# EAGLE board RedBot_Panel_v14a (EAGLE 7.5.0), part 1 of 5
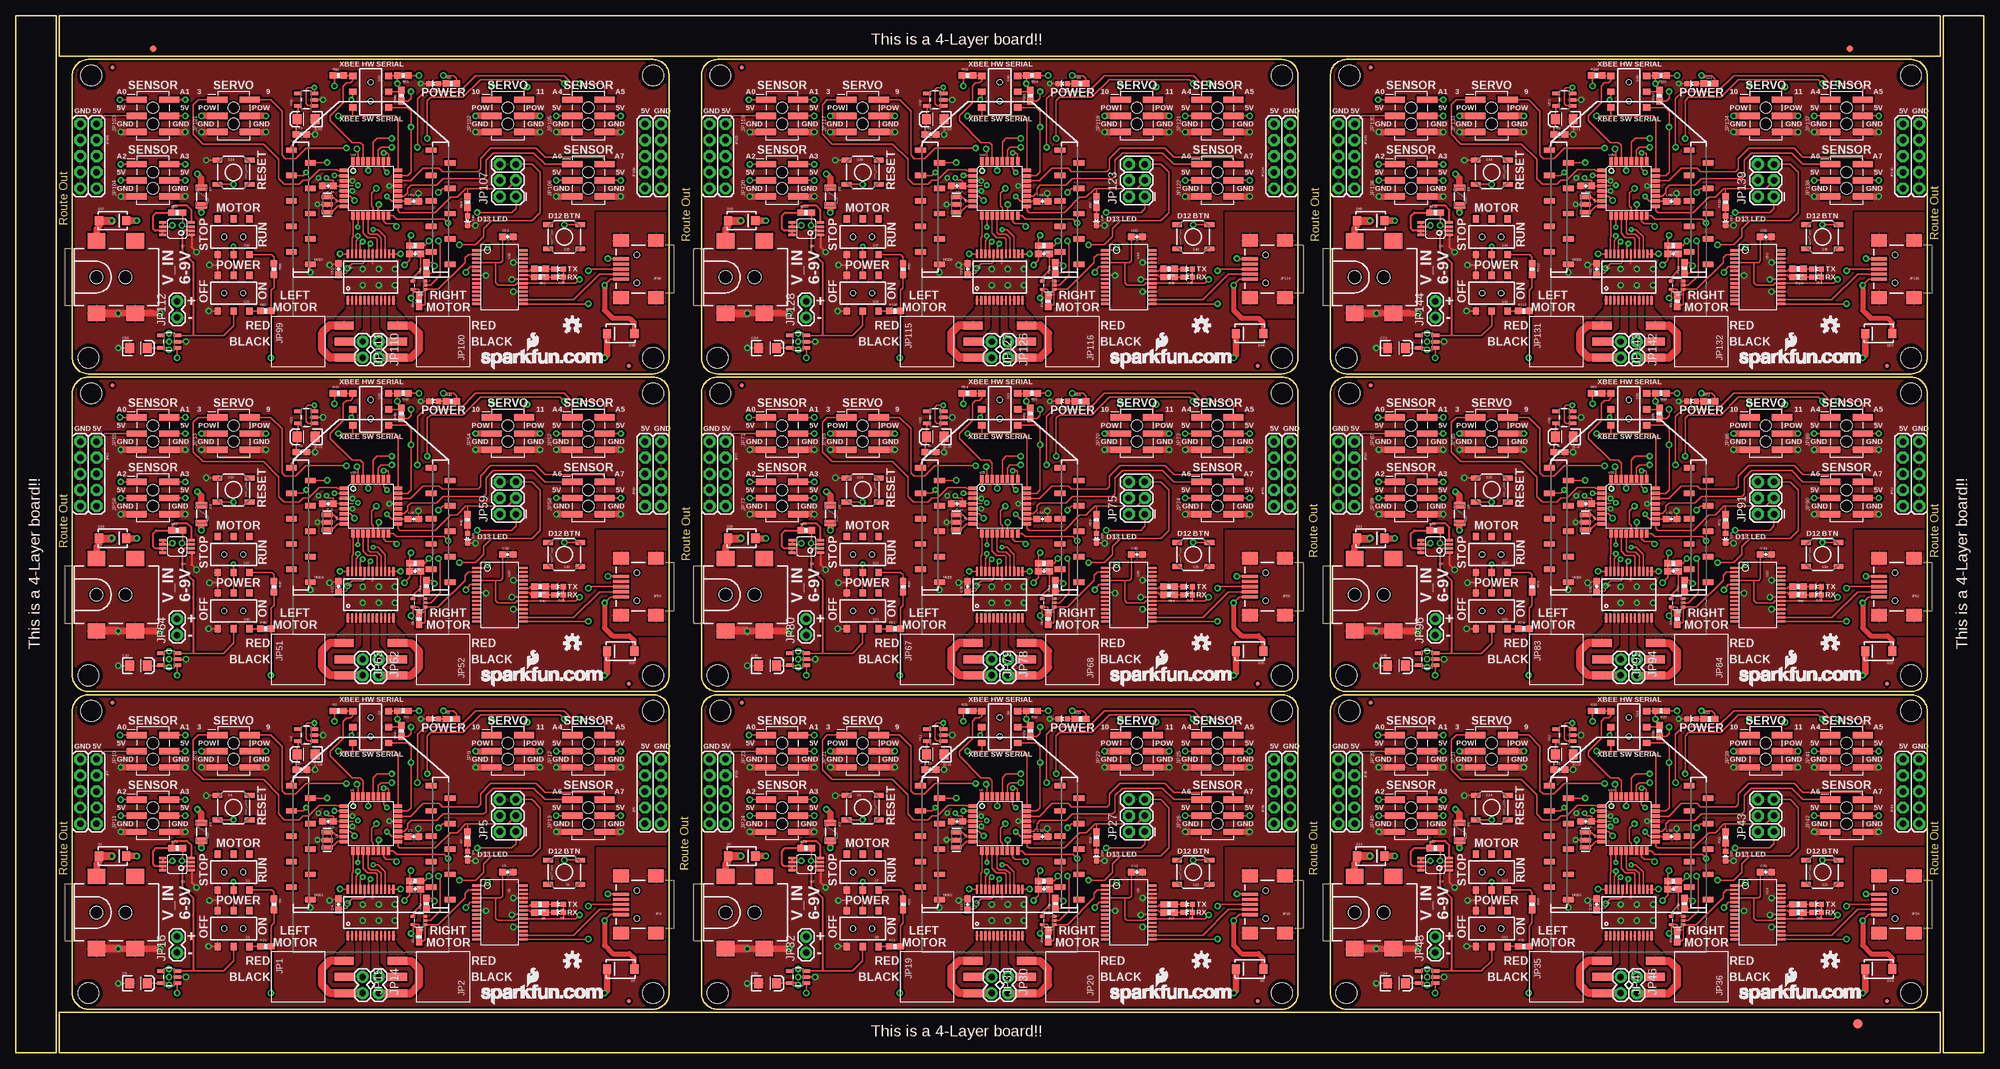
[diagram p0: board, top side]
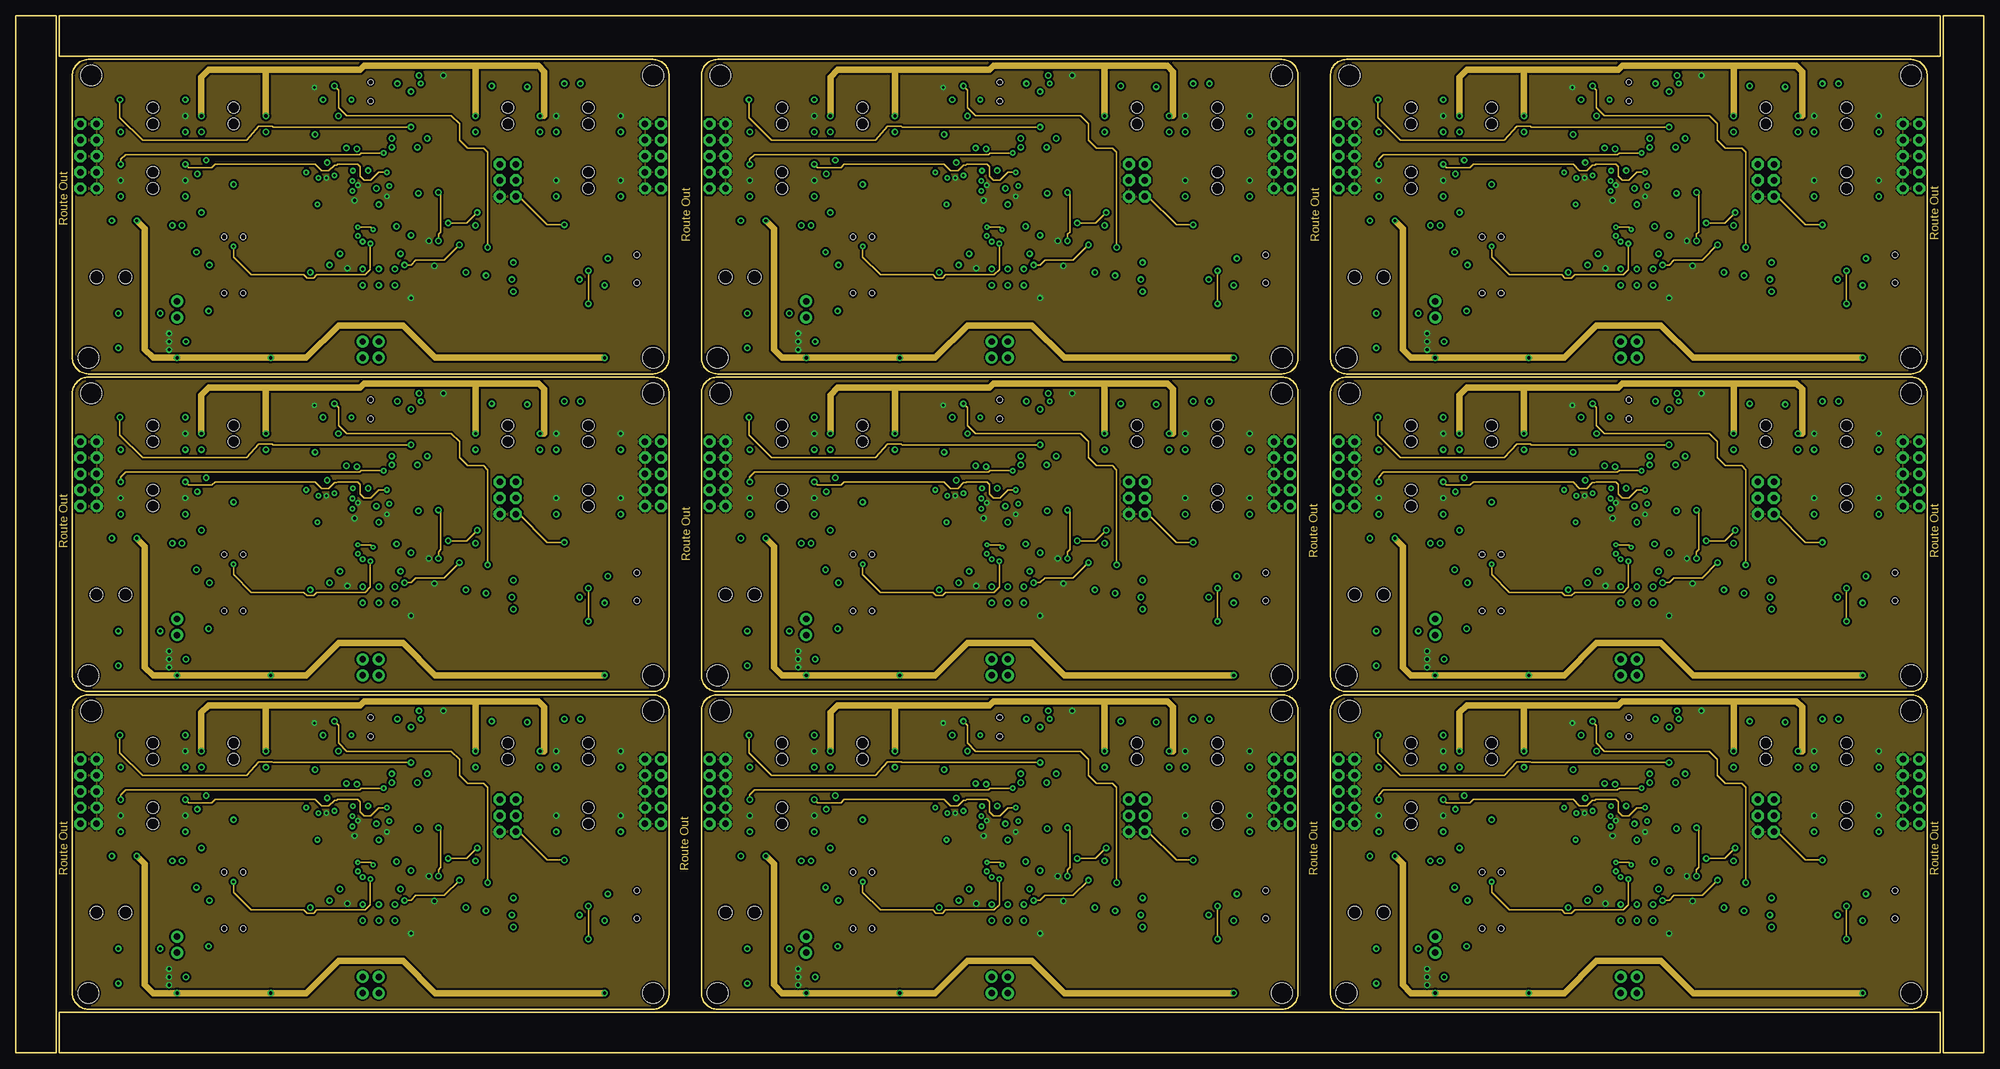
[diagram p1: board, inner layer 5V]
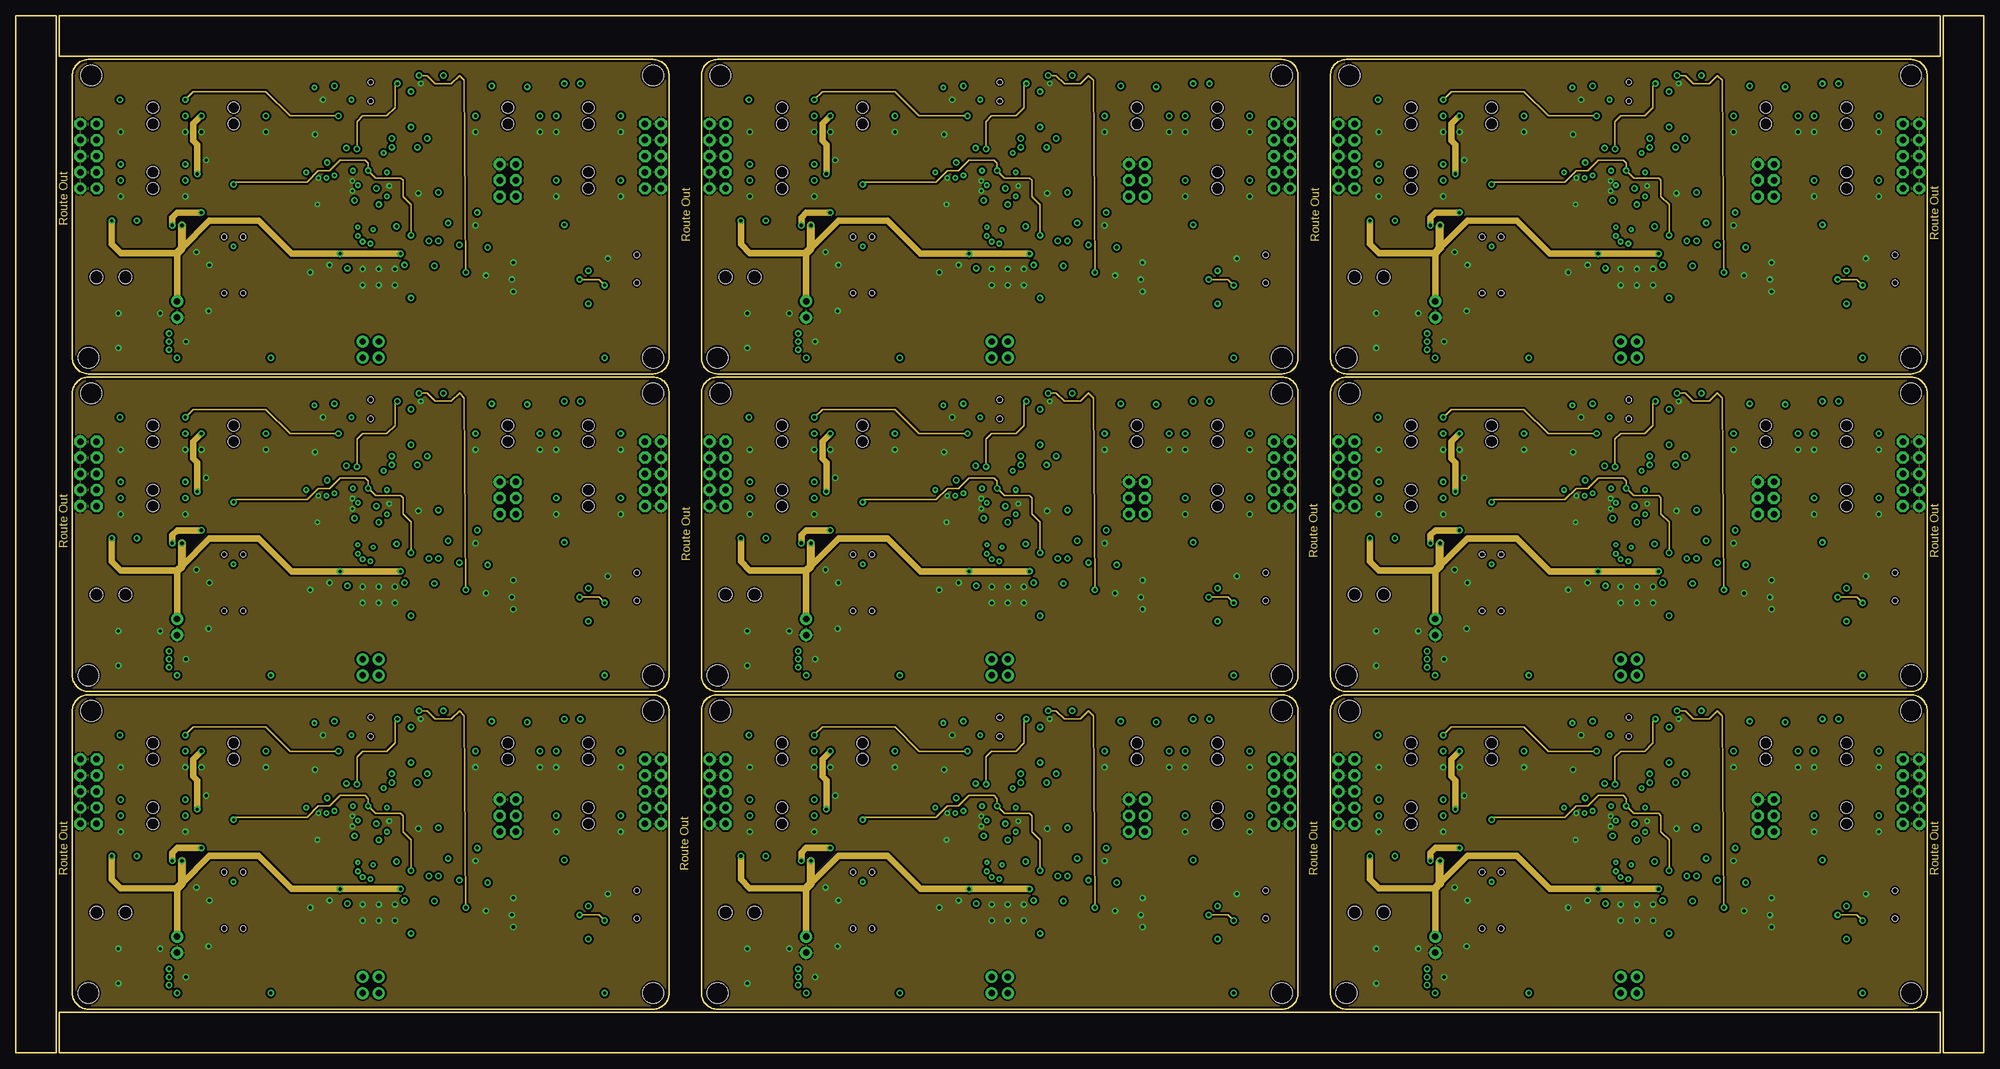
[diagram p2: board, inner layer Gnd]
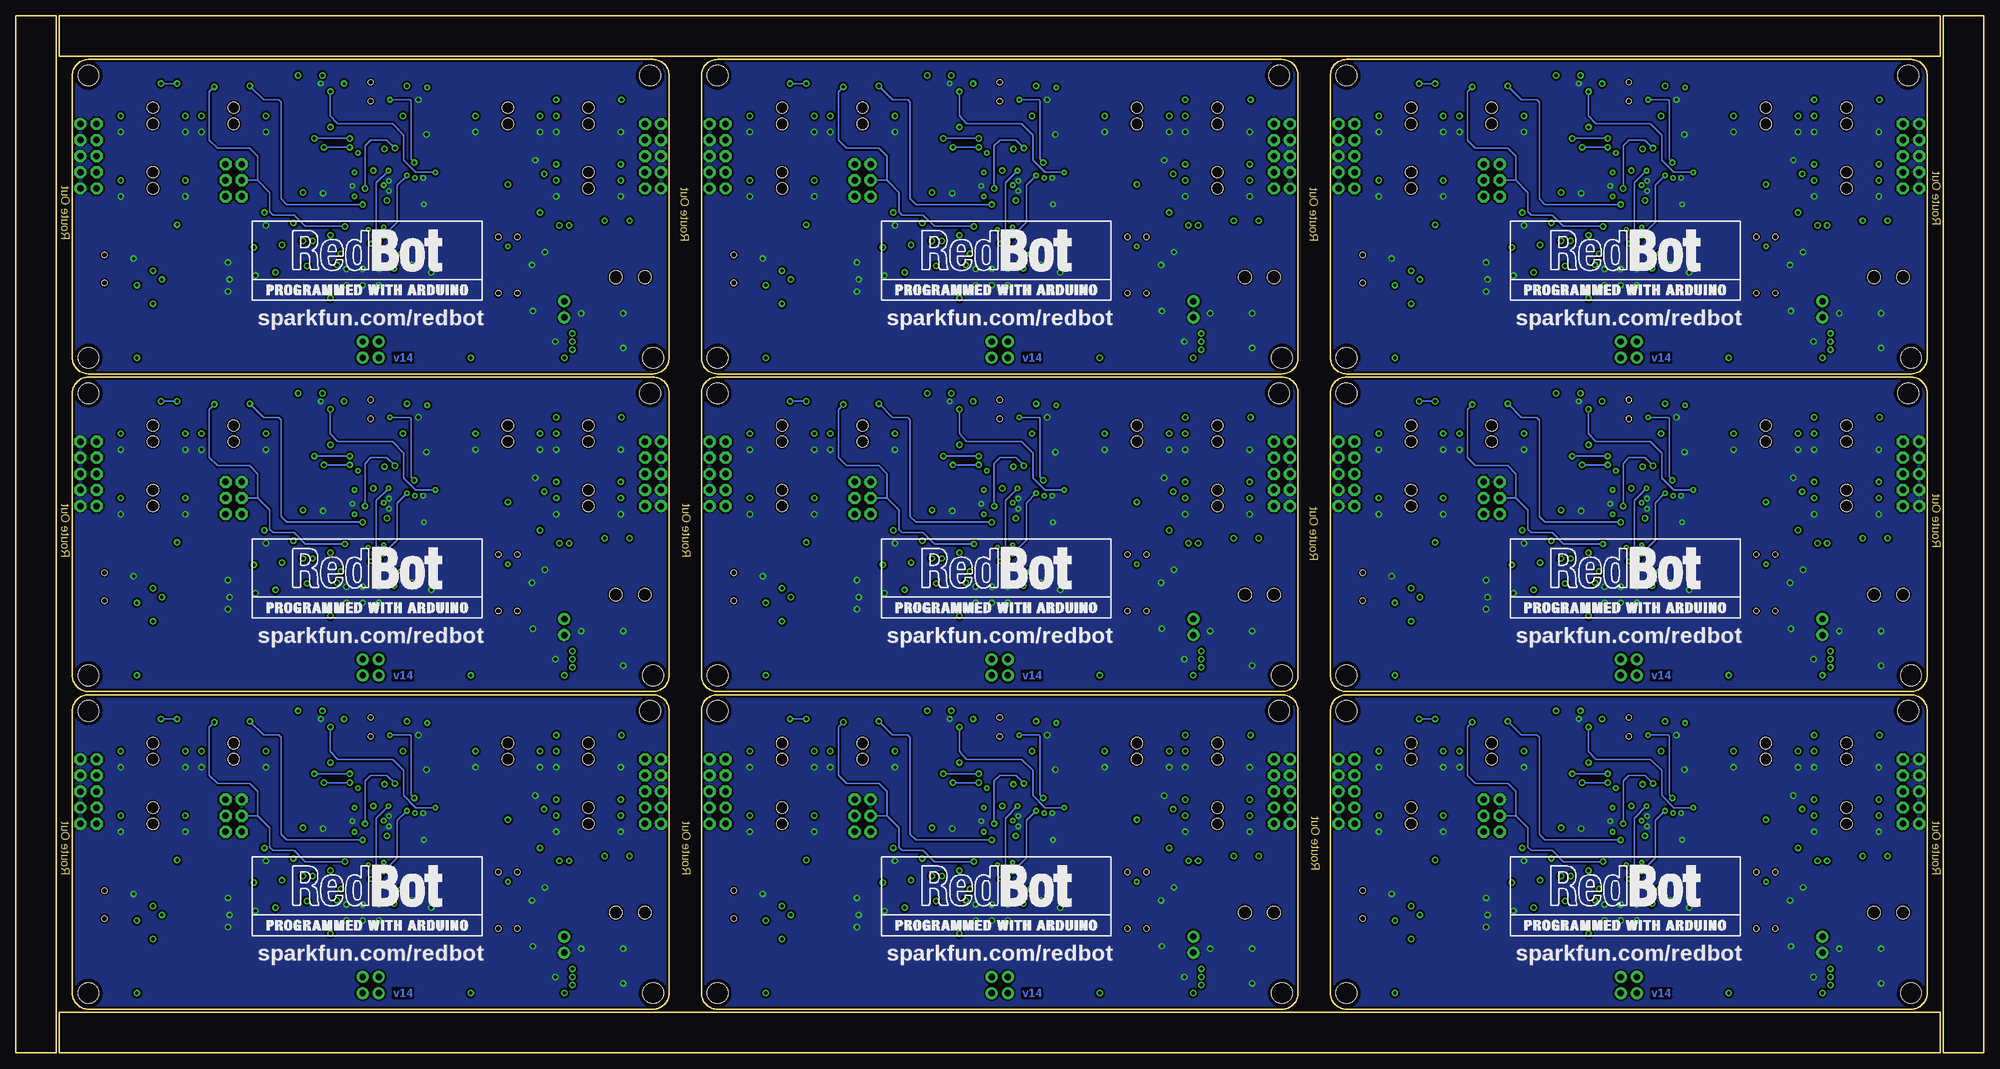
[diagram p3: board, bottom side, seen from below]

Size 309.88 x 163.32 mm. Coordinates in mm from the lower left corner, seen from the top.
Outline: 6.35,79.25 6.35,0 0,0 0,29.72
Outline: 0,27.18 0,163.32 6.35,163.32 6.35,76.71
Outline: 81.28,0 6.86,0 6.86,6.35 31.75,6.35
Outline: 29.21,6.35 303.02,6.35 303.02,0 78.74,0
Outline: 309.88,79.25 309.88,0 303.53,0 303.53,29.72
Outline: 303.53,27.18 303.53,163.32 309.88,163.32 309.88,76.71
Outline: 228.6,163.32 303.02,163.32 303.02,156.97 278.13,156.97
Outline: 280.67,156.97 6.86,156.97 6.86,163.32 231.14,163.32
Outline: 8.89,53.85 8.89,9.4 arc90 11.43,6.86 100.33,6.86 arc90 102.87,9.4 102.87,53.85 arc90 100.33,56.39 11.43,56.39 arc90 8.89,53.85
Outline: 107.95,53.85 107.95,9.4 arc90 110.49,6.86 199.39,6.86 arc90 201.93,9.4 201.93,53.85 arc90 199.39,56.39 110.49,56.39 arc90 107.95,53.85
Outline: 207.01,53.85 207.01,9.4 arc90 209.55,6.86 298.45,6.86 arc90 300.99,9.4 300.99,53.85 arc90 298.45,56.39 209.55,56.39 arc90 207.01,53.85
Outline: 8.89,103.89 8.89,59.44 arc90 11.43,56.9 100.33,56.9 arc90 102.87,59.44 102.87,103.89 arc90 100.33,106.43 11.43,106.43 arc90 8.89,103.89
Outline: 107.95,103.89 107.95,59.44 arc90 110.49,56.9 199.39,56.9 arc90 201.93,59.44 201.93,103.89 arc90 199.39,106.43 110.49,106.43 arc90 107.95,103.89
Outline: 207.01,103.89 207.01,59.44 arc90 209.55,56.9 298.45,56.9 arc90 300.99,59.44 300.99,103.89 arc90 298.45,106.43 209.55,106.43 arc90 207.01,103.89
Outline: 8.89,153.92 8.89,109.47 arc90 11.43,106.93 100.33,106.93 arc90 102.87,109.47 102.87,153.92 arc90 100.33,156.46 11.43,156.46 arc90 8.89,153.92
Outline: 107.95,153.92 107.95,109.47 arc90 110.49,106.93 199.39,106.93 arc90 201.93,109.47 201.93,153.92 arc90 199.39,156.46 110.49,156.46 arc90 107.95,153.92
Outline: 207.01,153.92 207.01,109.47 arc90 209.55,106.93 298.45,106.93 arc90 300.99,109.47 300.99,153.92 arc90 298.45,156.46 209.55,156.46 arc90 207.01,153.92
Copper layers (1*2+15*16): Top 0.035mm / dielectric 1.5mm / 5V 0.035mm / dielectric 0.15mm / Gnd 0.035mm / dielectric 0.2mm / Bottom 0.035mm
Design rules "Sparkfun *": minimum track width 8mil, minimum drill 15mil, track to track 8mil, track to pad 8mil, pad to pad 8mil, via to via 8mil, smd to smd 8mil, copper to edge 8mil, drill to drill 8mil, minimum pad ring 12mil, minimum via ring 10mil, stop-mask expansion 4mil, vias tented up to drill 20mil, thermal gap 10mil

## Footprints (pad centres in the part's own frame; a part is rotated, then mirrored left to right if it is on the bottom)
0603-CAP = smd 1.1 x 1: 1 -0.85,0; 2 0.85,0
EIA3216 = smd 1.4 x 1.6: A 1.4,0; C -1.4,0
SMA-DIODE = smd 1.27 x 1.47: A -2.15,0; C 2.15,0
LED-0603 = smd 0.8 x 0.8: A 0,-0.75; C 0,0.75
FIDUCIAL-1.5X3 = smd 1.5 x 1.5: 1 0,0
FIDUCIAL-1X2 = smd 1 x 1: 1 0,0
PTC-1206 = smd 1 x 1.8: 1 -1.4,0; 2 1.4,0
MICRO-FIDUCIAL = smd 0.635 x 0.635: 1 0,0
1X03_SMD_RA_FEMALE = smd 1.25 x 3: 1 -2.54,7.225; 2 0,7.225; 3 2.54,7.225
POWER_JACK_SMD = smd 2.8 x 2.4: GND 0,-5.7; P$4 6.1,-5.7; VIN0 0,5.7; VIN1 6.1,5.7 | hole 2.032: 0,0; 4.572,0
USB-MINIB = smd 2.5 x 0.5: D+ 2.5,0; D- 2.5,0.8; GND 2.5,-1.6; ID 2.5,-0.8; VBUS 2.5,1.6 | smd 2.5 x 2: MTN1 -3,4.5; MTN2 2.5,4.5; MTN3 -3,-4.5; MTN4 2.5,-4.5 | hole 0.9: 0,2.2; 0,-2.2
2X3 = drill 1.016 pad 1.88 octagon: 1 0,0; 2 0,2.54; 3 2.54,0; 4 2.54,2.54; 5 5.08,0; 6 5.08,2.54
2X5_NOSILK = drill 1.016 pad 1.88 octagon: 1 -1.27,5.08; 2 1.27,5.08; 3 -1.27,2.54; 4 1.27,2.54; 5 -1.27,0; 6 1.27,0; 7 -1.27,-2.54; 8 1.27,-2.54; 9 -1.27,-5.08; 10 1.27,-5.08
2X3_SMT_POSTS = smd 1 x 3.17: 1 -2.54,-2.54; 2 -2.54,2.54; 3 0,-2.54; 4 0,2.54; 5 2.54,-2.54; 6 2.54,2.54 | hole 1.8: -1.27,0; 1.27,0
1X02 = drill 1.016 pad 1.88: 1 0,0; 2 2.54,0
XBEE-SMD = smd 1.7 x 0.85: 1 -12.5,20; 2 -9.5,18; 3 -12.5,16; 4 -9.5,14; 5 -12.5,12; 6 -9.5,10; 7 -12.5,8; 8 -9.5,6; 9 -12.5,4; 10 -9.5,2; 11 12.5,2; 12 9.5,4; 13 12.5,6; 14 9.5,8; 15 12.5,10; 16 9.5,12; 17 12.5,14; 18 9.5,16; 19 12.5,18; 20 9.5,20
MSOP8 = smd 0.4 x 1.1: 1 -0.975,-2.25; 2 -0.325,-2.25; 3 0.325,-2.25; 4 0.975,-2.25; 5 0.975,2.25; 6 0.325,2.25; 7 -0.325,2.25; 8 -0.975,2.25
0603-RES = smd 1.1 x 1: 1 -0.85,0; 2 0.85,0
AYZ0202 = smd 1 x 1.15: 1 -2.5,2.825; 2 0,2.825; 3 2.5,2.825; 4 -2.5,-2.825; 5 0,-2.825; 6 2.5,-2.825 | hole 0.85: 1.5,0; -1.5,0
TACTILE_SWITCH_SMD = smd 1.524 x 0.762: 1 -2.54,1.905; 2 2.54,1.905; 3 -2.54,-1.905; 4 2.54,-1.905
STAND-OFF = hole 3.302: 0,0
TQFP32-08 = smd 1.27 x 0.559: 1 -4.293,2.8; 2 -4.293,2; 3 -4.293,1.2; 4 -4.293,0.4; 5 -4.293,-0.4; 6 -4.293,-1.2; 7 -4.293,-2; 8 -4.293,-2.8; 17 4.293,-2.8; 18 4.293,-2; 19 4.293,-1.2; 20 4.293,-0.4; 21 4.293,0.4; 22 4.293,1.2; 23 4.293,2; 24 4.293,2.8 | smd 0.559 x 1.27: 9 -2.8,-4.293; 10 -2,-4.293; 11 -1.2,-4.293; 12 -0.4,-4.293; 13 0.4,-4.293; 14 1.2,-4.293; 15 2,-4.293; 16 2.8,-4.293; 25 2.8,4.293; 26 2,4.293; 27 1.2,4.293; 28 0.4,4.293; 29 -0.4,4.293; 30 -1.2,4.293; 31 -2,4.293; 32 -2.8,4.293
SSOP24 = smd 0.348 x 1.397: 1 -3.575,-3.656; 2 -2.925,-3.656; 3 -2.275,-3.656; 4 -1.625,-3.656; 5 -0.975,-3.656; 6 -0.325,-3.656; 7 0.325,-3.656; 8 0.975,-3.656; 9 1.625,-3.656; 10 2.275,-3.656; 11 2.925,-3.656; 12 3.575,-3.656; 13 3.575,3.656; 14 2.925,3.656; 15 2.275,3.656; 16 1.625,3.656; 17 0.975,3.656; 18 0.325,3.656; 19 -0.325,3.656; 20 -0.975,3.656; 21 -1.625,3.656; 22 -2.275,3.656; 23 -2.925,3.656; 24 -3.575,3.656
SOT23-5 = smd 0.55 x 1.2: 1 -0.95,-1.3; 2 0,-1.3; 3 0.95,-1.3; 4 0.95,1.3; 5 -0.95,1.3
SSOP28DB = smd 0.348 x 1.397: 1 -4.225,-3.656; 2 -3.575,-3.656; 3 -2.925,-3.656; 4 -2.275,-3.656; 5 -1.625,-3.656; 6 -0.975,-3.656; 7 -0.325,-3.656; 8 0.325,-3.656; 9 0.975,-3.656; 10 1.625,-3.656; 11 2.275,-3.656; 12 2.925,-3.656; 13 3.575,-3.656; 14 4.225,-3.656; 15 4.225,3.656; 16 3.575,3.656; 17 2.925,3.656; 18 2.275,3.656; 19 1.625,3.656; 20 0.975,3.656; 21 0.325,3.656; 22 -0.325,3.656; 23 -0.975,3.656; 24 -1.625,3.656; 25 -2.275,3.656; 26 -2.925,3.656; 27 -3.575,3.656; 28 -4.225,3.656
SOT353 = smd 0.42 x 0.7: 1 -0.65,-0.95; 2 0,-0.95; 3 0.65,-0.95; 4 0.65,0.95; 5 -0.65,0.95
RESONATOR-SMD = smd 0.7 x 1.7: 1 -1.2,0; 2 0,0; 3 1.2,0

## Placement (x,y rotation side)
C1  0.1uF  [0603-CAP]  148.21,36.45 180 top
C2  0.1uF  [0603-CAP]  49.15,36.45 180 top
C3  0.1uF  [0603-CAP]  62.61,34.04 0 top
C4  0.1uF  [0603-CAP]  50.8,23.37 90 top
C5  0.1uF  [0603-CAP]  77.47,28.45 0 top
C6  0.1uF  [0603-CAP]  44.96,44.58 0 top
C7  0.1uF  [0603-CAP]  62.87,25.78 0 top
C8  10uF  [EIA3216]  45.72,46.99 180 top
C9  10uF  [EIA3216]  19.3,10.92 0 top
C10  0.1uF  [0603-CAP]  161.67,34.04 0 top
C11  0.1uF  [0603-CAP]  149.86,23.37 90 top
C12  0.1uF  [0603-CAP]  176.53,28.45 0 top
C13  0.1uF  [0603-CAP]  144.02,44.58 0 top
C14  0.1uF  [0603-CAP]  161.93,25.78 0 top
C15  10uF  [EIA3216]  144.78,46.99 180 top
C16  10uF  [EIA3216]  118.36,10.92 0 top
C17  0.1uF  [0603-CAP]  247.27,36.45 180 top
C18  0.1uF  [0603-CAP]  260.73,34.04 0 top
C19  0.1uF  [0603-CAP]  248.92,23.37 90 top
C20  0.1uF  [0603-CAP]  275.59,28.45 0 top
C21  0.1uF  [0603-CAP]  243.08,44.58 0 top
C22  0.1uF  [0603-CAP]  260.99,25.78 0 top
C23  10uF  [EIA3216]  243.84,46.99 180 top
C24  10uF  [EIA3216]  217.42,10.92 0 top
C25  0.1uF  [0603-CAP]  49.15,86.49 180 top
C26  0.1uF  [0603-CAP]  62.61,84.07 0 top
C27  0.1uF  [0603-CAP]  50.8,73.41 90 top
C28  0.1uF  [0603-CAP]  77.47,78.49 0 top
C29  0.1uF  [0603-CAP]  44.96,94.61 0 top
C30  0.1uF  [0603-CAP]  62.87,75.82 0 top
C31  10uF  [EIA3216]  45.72,97.03 180 top
C32  10uF  [EIA3216]  19.3,60.96 0 top
C33  0.1uF  [0603-CAP]  148.21,86.49 180 top
C34  0.1uF  [0603-CAP]  161.67,84.07 0 top
C35  0.1uF  [0603-CAP]  149.86,73.41 90 top
C36  0.1uF  [0603-CAP]  176.53,78.49 0 top
C37  0.1uF  [0603-CAP]  144.02,94.61 0 top
C38  0.1uF  [0603-CAP]  161.93,75.82 0 top
C39  10uF  [EIA3216]  144.78,97.03 180 top
C40  10uF  [EIA3216]  118.36,60.96 0 top
C41  0.1uF  [0603-CAP]  247.27,86.49 180 top
C42  0.1uF  [0603-CAP]  260.73,84.07 0 top
C43  0.1uF  [0603-CAP]  248.92,73.41 90 top
C44  0.1uF  [0603-CAP]  275.59,78.49 0 top
C45  0.1uF  [0603-CAP]  243.08,94.61 0 top
C46  0.1uF  [0603-CAP]  260.99,75.82 0 top
C47  10uF  [EIA3216]  243.84,97.03 180 top
C48  10uF  [EIA3216]  217.42,60.96 0 top
C49  0.1uF  [0603-CAP]  49.15,136.53 180 top
C50  0.1uF  [0603-CAP]  62.61,134.11 0 top
C51  0.1uF  [0603-CAP]  50.8,123.44 90 top
C52  0.1uF  [0603-CAP]  77.47,128.52 0 top
C53  0.1uF  [0603-CAP]  44.96,144.65 0 top
C54  0.1uF  [0603-CAP]  62.87,125.86 0 top
C55  10uF  [EIA3216]  45.72,147.07 180 top
C56  10uF  [EIA3216]  19.3,111 0 top
C57  0.1uF  [0603-CAP]  148.21,136.53 180 top
C58  0.1uF  [0603-CAP]  161.67,134.11 0 top
C59  0.1uF  [0603-CAP]  149.86,123.44 90 top
C60  0.1uF  [0603-CAP]  176.53,128.52 0 top
C61  0.1uF  [0603-CAP]  144.02,144.65 0 top
C62  0.1uF  [0603-CAP]  161.93,125.86 0 top
C63  10uF  [EIA3216]  144.78,147.07 180 top
C64  10uF  [EIA3216]  118.36,111 0 top
C65  0.1uF  [0603-CAP]  247.27,136.53 180 top
C66  0.1uF  [0603-CAP]  260.73,134.11 0 top
C67  0.1uF  [0603-CAP]  248.92,123.44 90 top
C68  0.1uF  [0603-CAP]  275.59,128.52 0 top
C69  0.1uF  [0603-CAP]  243.08,144.65 0 top
C70  0.1uF  [0603-CAP]  260.99,125.86 0 top
C71  10uF  [EIA3216]  243.84,147.07 180 top
C72  10uF  [EIA3216]  217.42,111 0 top
D1  [SMA-DIODE]  15.24,30.99 0 top
D2  [SMA-DIODE]  95.25,13.21 180 top
D3  GREEN  [LED-0603]  85.47,22.1 90 top
D4  GREEN  [LED-0603]  71.12,30.99 180 top
D5  GREEN  [LED-0603]  85.47,23.37 90 top
D6  GREEN  [LED-0603]  65.79,52.58 90 top
D7  [SMA-DIODE]  114.3,30.99 0 top
D8  [SMA-DIODE]  194.31,13.21 180 top
D9  GREEN  [LED-0603]  184.53,22.1 90 top
D10  GREEN  [LED-0603]  170.18,30.99 180 top
D11  GREEN  [LED-0603]  184.53,23.37 90 top
D12  GREEN  [LED-0603]  164.85,52.58 90 top
D13  [SMA-DIODE]  213.36,30.99 0 top
D14  [SMA-DIODE]  293.37,13.21 180 top
D15  GREEN  [LED-0603]  283.59,22.1 90 top
D16  GREEN  [LED-0603]  269.24,30.99 180 top
D17  GREEN  [LED-0603]  283.59,23.37 90 top
D18  GREEN  [LED-0603]  263.91,52.58 90 top
D19  [SMA-DIODE]  15.24,81.03 0 top
D20  [SMA-DIODE]  95.25,63.25 180 top
D21  GREEN  [LED-0603]  85.47,72.14 90 top
D22  GREEN  [LED-0603]  71.12,81.03 180 top
D23  GREEN  [LED-0603]  85.47,73.41 90 top
D24  GREEN  [LED-0603]  65.79,102.62 90 top
D25  [SMA-DIODE]  114.3,81.03 0 top
D26  [SMA-DIODE]  194.31,63.25 180 top
D27  GREEN  [LED-0603]  184.53,72.14 90 top
D28  GREEN  [LED-0603]  170.18,81.03 180 top
D29  GREEN  [LED-0603]  184.53,73.41 90 top
D30  GREEN  [LED-0603]  164.85,102.62 90 top
D31  [SMA-DIODE]  213.36,81.03 0 top
D32  [SMA-DIODE]  293.37,63.25 180 top
D33  GREEN  [LED-0603]  283.59,72.14 90 top
D34  GREEN  [LED-0603]  269.24,81.03 180 top
D35  GREEN  [LED-0603]  283.59,73.41 90 top
D36  GREEN  [LED-0603]  263.91,102.62 90 top
D37  [SMA-DIODE]  15.24,131.06 0 top
D38  [SMA-DIODE]  95.25,113.28 180 top
D39  GREEN  [LED-0603]  85.47,122.17 90 top
D40  GREEN  [LED-0603]  71.12,131.06 180 top
D41  GREEN  [LED-0603]  85.47,123.44 90 top
D42  GREEN  [LED-0603]  65.79,152.65 90 top
D43  [SMA-DIODE]  114.3,131.06 0 top
D44  [SMA-DIODE]  194.31,113.28 180 top
D45  GREEN  [LED-0603]  184.53,122.17 90 top
D46  GREEN  [LED-0603]  170.18,131.06 180 top
D47  GREEN  [LED-0603]  184.53,123.44 90 top
D48  GREEN  [LED-0603]  164.85,152.65 90 top
D49  [SMA-DIODE]  213.36,131.06 0 top
D50  [SMA-DIODE]  293.37,113.28 180 top
D51  GREEN  [LED-0603]  283.59,122.17 90 top
D52  GREEN  [LED-0603]  269.24,131.06 180 top
D53  GREEN  [LED-0603]  283.59,123.44 90 top
D54  GREEN  [LED-0603]  263.91,152.65 90 top
E$1  [FIDUCIAL-1.5X3]  290.07,4.57 0 top
E$7  [FIDUCIAL-1X2]  288.8,158.12 90 top
E$8  [FIDUCIAL-1X2]  21.59,158.12 270 top
F1  PTCSMD  [PTC-1206]  29.21,34.8 270 top
F2  PTCSMD  [PTC-1206]  128.27,34.8 270 top
F3  PTCSMD  [PTC-1206]  227.33,34.8 270 top
F4  PTCSMD  [PTC-1206]  29.21,84.84 270 top
F5  PTCSMD  [PTC-1206]  128.27,84.84 270 top
F6  PTCSMD  [PTC-1206]  227.33,84.84 270 top
F7  PTCSMD  [PTC-1206]  29.21,134.87 270 top
F8  PTCSMD  [PTC-1206]  128.27,134.87 270 top
F9  PTCSMD  [PTC-1206]  227.33,134.87 270 top
FID1  FIDUCIALUFIDUCIAL  [MICRO-FIDUCIAL]  15.24,55.12 0 top
FID2  FIDUCIALUFIDUCIAL  [MICRO-FIDUCIAL]  96.52,8.13 0 top
FID3  FIDUCIALUFIDUCIAL  [MICRO-FIDUCIAL]  114.3,55.12 0 top
FID4  FIDUCIALUFIDUCIAL  [MICRO-FIDUCIAL]  195.58,8.13 0 top
FID5  FIDUCIALUFIDUCIAL  [MICRO-FIDUCIAL]  213.36,55.12 0 top
FID6  FIDUCIALUFIDUCIAL  [MICRO-FIDUCIAL]  294.64,8.13 0 top
FID7  FIDUCIALUFIDUCIAL  [MICRO-FIDUCIAL]  15.24,105.16 0 top
FID8  FIDUCIALUFIDUCIAL  [MICRO-FIDUCIAL]  96.52,58.17 0 top
FID9  FIDUCIALUFIDUCIAL  [MICRO-FIDUCIAL]  114.3,105.16 0 top
FID10  FIDUCIALUFIDUCIAL  [MICRO-FIDUCIAL]  195.58,58.17 0 top
FID11  FIDUCIALUFIDUCIAL  [MICRO-FIDUCIAL]  213.36,105.16 0 top
FID12  FIDUCIALUFIDUCIAL  [MICRO-FIDUCIAL]  294.64,58.17 0 top
FID13  FIDUCIALUFIDUCIAL  [MICRO-FIDUCIAL]  15.24,155.19 0 top
FID14  FIDUCIALUFIDUCIAL  [MICRO-FIDUCIAL]  96.52,108.2 0 top
FID15  FIDUCIALUFIDUCIAL  [MICRO-FIDUCIAL]  114.3,155.19 0 top
FID16  FIDUCIALUFIDUCIAL  [MICRO-FIDUCIAL]  195.58,108.2 0 top
FID17  FIDUCIALUFIDUCIAL  [MICRO-FIDUCIAL]  213.36,155.19 0 top
FID18  FIDUCIALUFIDUCIAL  [MICRO-FIDUCIAL]  294.64,108.2 0 top
JP1  1x3 RA Female .1"  [1X03_SMD_RA_FEMALE]  44.45,11.94 270 top
JP2  1x3 RA Female .1"  [1X03_SMD_RA_FEMALE]  67.31,11.94 90 top
JP3  5.5x2.1mm Barrel  [POWER_JACK_SMD]  12.7,22.1 0 top
JP4  USB-B  [USB-MINIB]  97.79,23.37 180 top
JP5  AVR_SPI_PRG_6PTH  [2X3]  78.74,34.8 90 top
JP6  M05X2NO_SILK  [2X5_NOSILK]  100.33,41.15 0 top
JP7  M05X2NO_SILK  [2X5_NOSILK]  11.43,41.15 180 top
JP8  [2X3_SMT_POSTS]  34.29,47.5 270 top
JP9  [2X3_SMT_POSTS]  77.47,47.5 270 top
JP10  [2X3_SMT_POSTS]  21.59,47.5 270 top
JP11  [2X3_SMT_POSTS]  21.59,37.34 270 top
JP12  [2X3_SMT_POSTS]  90.17,47.5 270 top
JP13  [2X3_SMT_POSTS]  90.17,37.34 270 top
JP14  [1X02]  57.15,11.94 270 top
JP15  [1X02]  54.61,11.94 270 top
JP16  [1X02]  25.4,15.75 90 top
JP17  5.5x2.1mm Barrel  [POWER_JACK_SMD]  111.76,22.1 0 top
JP18  USB-B  [USB-MINIB]  196.85,23.37 180 top
JP19  1x3 RA Female .1"  [1X03_SMD_RA_FEMALE]  143.51,11.94 270 top
JP20  1x3 RA Female .1"  [1X03_SMD_RA_FEMALE]  166.37,11.94 90 top
JP21  [2X3_SMT_POSTS]  133.35,47.5 270 top
JP22  [2X3_SMT_POSTS]  176.53,47.5 270 top
JP23  [2X3_SMT_POSTS]  120.65,47.5 270 top
JP24  [2X3_SMT_POSTS]  120.65,37.34 270 top
JP25  [2X3_SMT_POSTS]  189.23,47.5 270 top
JP26  [2X3_SMT_POSTS]  189.23,37.34 270 top
JP27  AVR_SPI_PRG_6PTH  [2X3]  177.8,34.8 90 top
JP28  M05X2NO_SILK  [2X5_NOSILK]  199.39,41.15 0 top
JP29  M05X2NO_SILK  [2X5_NOSILK]  110.49,41.15 180 top
JP30  [1X02]  156.21,11.94 270 top
JP31  [1X02]  153.67,11.94 270 top
JP32  [1X02]  124.46,15.75 90 top
JP33  5.5x2.1mm Barrel  [POWER_JACK_SMD]  210.82,22.1 0 top
JP34  USB-B  [USB-MINIB]  295.91,23.37 180 top
JP35  1x3 RA Female .1"  [1X03_SMD_RA_FEMALE]  242.57,11.94 270 top
JP36  1x3 RA Female .1"  [1X03_SMD_RA_FEMALE]  265.43,11.94 90 top
JP37  [2X3_SMT_POSTS]  232.41,47.5 270 top
JP38  [2X3_SMT_POSTS]  275.59,47.5 270 top
JP39  [2X3_SMT_POSTS]  219.71,47.5 270 top
JP40  [2X3_SMT_POSTS]  219.71,37.34 270 top
JP41  [2X3_SMT_POSTS]  288.29,47.5 270 top
JP42  [2X3_SMT_POSTS]  288.29,37.34 270 top
JP43  AVR_SPI_PRG_6PTH  [2X3]  276.86,34.8 90 top
JP44  M05X2NO_SILK  [2X5_NOSILK]  298.45,41.15 0 top
JP45  M05X2NO_SILK  [2X5_NOSILK]  209.55,41.15 180 top
JP46  [1X02]  255.27,11.94 270 top
JP47  [1X02]  252.73,11.94 270 top
JP48  [1X02]  223.52,15.75 90 top
JP49  5.5x2.1mm Barrel  [POWER_JACK_SMD]  12.7,72.14 0 top
JP50  USB-B  [USB-MINIB]  97.79,73.41 180 top
JP51  1x3 RA Female .1"  [1X03_SMD_RA_FEMALE]  44.45,61.98 270 top
JP52  1x3 RA Female .1"  [1X03_SMD_RA_FEMALE]  67.31,61.98 90 top
JP53  [2X3_SMT_POSTS]  34.29,97.54 270 top
JP54  [2X3_SMT_POSTS]  77.47,97.54 270 top
JP55  [2X3_SMT_POSTS]  21.59,97.54 270 top
JP56  [2X3_SMT_POSTS]  21.59,87.38 270 top
JP57  [2X3_SMT_POSTS]  90.17,97.54 270 top
JP58  [2X3_SMT_POSTS]  90.17,87.38 270 top
JP59  AVR_SPI_PRG_6PTH  [2X3]  78.74,84.84 90 top
JP60  M05X2NO_SILK  [2X5_NOSILK]  100.33,91.19 0 top
JP61  M05X2NO_SILK  [2X5_NOSILK]  11.43,91.19 180 top
JP62  [1X02]  57.15,61.98 270 top
JP63  [1X02]  54.61,61.98 270 top
JP64  [1X02]  25.4,65.79 90 top
JP65  5.5x2.1mm Barrel  [POWER_JACK_SMD]  111.76,72.14 0 top
JP66  USB-B  [USB-MINIB]  196.85,73.41 180 top
JP67  1x3 RA Female .1"  [1X03_SMD_RA_FEMALE]  143.51,61.98 270 top
JP68  1x3 RA Female .1"  [1X03_SMD_RA_FEMALE]  166.37,61.98 90 top
JP69  [2X3_SMT_POSTS]  133.35,97.54 270 top
JP70  [2X3_SMT_POSTS]  176.53,97.54 270 top
JP71  [2X3_SMT_POSTS]  120.65,97.54 270 top
JP72  [2X3_SMT_POSTS]  120.65,87.38 270 top
JP73  [2X3_SMT_POSTS]  189.23,97.54 270 top
JP74  [2X3_SMT_POSTS]  189.23,87.38 270 top
JP75  AVR_SPI_PRG_6PTH  [2X3]  177.8,84.84 90 top
JP76  M05X2NO_SILK  [2X5_NOSILK]  199.39,91.19 0 top
JP77  M05X2NO_SILK  [2X5_NOSILK]  110.49,91.19 180 top
JP78  [1X02]  156.21,61.98 270 top
JP79  [1X02]  153.67,61.98 270 top
JP80  [1X02]  124.46,65.79 90 top
JP81  5.5x2.1mm Barrel  [POWER_JACK_SMD]  210.82,72.14 0 top
JP82  USB-B  [USB-MINIB]  295.91,73.41 180 top
JP83  1x3 RA Female .1"  [1X03_SMD_RA_FEMALE]  242.57,61.98 270 top
JP84  1x3 RA Female .1"  [1X03_SMD_RA_FEMALE]  265.43,61.98 90 top
JP85  [2X3_SMT_POSTS]  232.41,97.54 270 top
JP86  [2X3_SMT_POSTS]  275.59,97.54 270 top
JP87  [2X3_SMT_POSTS]  219.71,97.54 270 top
JP88  [2X3_SMT_POSTS]  219.71,87.38 270 top
JP89  [2X3_SMT_POSTS]  288.29,97.54 270 top
JP90  [2X3_SMT_POSTS]  288.29,87.38 270 top
JP91  AVR_SPI_PRG_6PTH  [2X3]  276.86,84.84 90 top
JP92  M05X2NO_SILK  [2X5_NOSILK]  298.45,91.19 0 top
JP93  M05X2NO_SILK  [2X5_NOSILK]  209.55,91.19 180 top
JP94  [1X02]  255.27,61.98 270 top
JP95  [1X02]  252.73,61.98 270 top
JP96  [1X02]  223.52,65.79 90 top
JP97  5.5x2.1mm Barrel  [POWER_JACK_SMD]  12.7,122.17 0 top
JP98  USB-B  [USB-MINIB]  97.79,123.44 180 top
JP99  1x3 RA Female .1"  [1X03_SMD_RA_FEMALE]  44.45,112.01 270 top
JP100  1x3 RA Female .1"  [1X03_SMD_RA_FEMALE]  67.31,112.01 90 top
JP101  [2X3_SMT_POSTS]  34.29,147.57 270 top
JP102  [2X3_SMT_POSTS]  77.47,147.57 270 top
JP103  [2X3_SMT_POSTS]  21.59,147.57 270 top
JP104  [2X3_SMT_POSTS]  21.59,137.41 270 top
JP105  [2X3_SMT_POSTS]  90.17,147.57 270 top
JP106  [2X3_SMT_POSTS]  90.17,137.41 270 top
JP107  AVR_SPI_PRG_6PTH  [2X3]  78.74,134.87 90 top
JP108  M05X2NO_SILK  [2X5_NOSILK]  100.33,141.22 0 top
JP109  M05X2NO_SILK  [2X5_NOSILK]  11.43,141.22 180 top
JP110  [1X02]  57.15,112.01 270 top
JP111  [1X02]  54.61,112.01 270 top
JP112  [1X02]  25.4,115.82 90 top
JP113  5.5x2.1mm Barrel  [POWER_JACK_SMD]  111.76,122.17 0 top
JP114  USB-B  [USB-MINIB]  196.85,123.44 180 top
JP115  1x3 RA Female .1"  [1X03_SMD_RA_FEMALE]  143.51,112.01 270 top
JP116  1x3 RA Female .1"  [1X03_SMD_RA_FEMALE]  166.37,112.01 90 top
JP117  [2X3_SMT_POSTS]  133.35,147.57 270 top
JP118  [2X3_SMT_POSTS]  176.53,147.57 270 top
JP119  [2X3_SMT_POSTS]  120.65,147.57 270 top
JP120  [2X3_SMT_POSTS]  120.65,137.41 270 top
JP121  [2X3_SMT_POSTS]  189.23,147.57 270 top
JP122  [2X3_SMT_POSTS]  189.23,137.41 270 top
JP123  AVR_SPI_PRG_6PTH  [2X3]  177.8,134.87 90 top
JP124  M05X2NO_SILK  [2X5_NOSILK]  199.39,141.22 0 top
JP125  M05X2NO_SILK  [2X5_NOSILK]  110.49,141.22 180 top
JP126  [1X02]  156.21,112.01 270 top
JP127  [1X02]  153.67,112.01 270 top
JP128  [1X02]  124.46,115.82 90 top
JP129  5.5x2.1mm Barrel  [POWER_JACK_SMD]  210.82,122.17 0 top
JP130  USB-B  [USB-MINIB]  295.91,123.44 180 top
JP131  1x3 RA Female .1"  [1X03_SMD_RA_FEMALE]  242.57,112.01 270 top
JP132  1x3 RA Female .1"  [1X03_SMD_RA_FEMALE]  265.43,112.01 90 top
JP133  [2X3_SMT_POSTS]  232.41,147.57 270 top
JP134  [2X3_SMT_POSTS]  275.59,147.57 270 top
JP135  [2X3_SMT_POSTS]  219.71,147.57 270 top
JP136  [2X3_SMT_POSTS]  219.71,137.41 270 top
JP137  [2X3_SMT_POSTS]  288.29,147.57 270 top
JP138  [2X3_SMT_POSTS]  288.29,137.41 270 top
JP139  AVR_SPI_PRG_6PTH  [2X3]  276.86,134.87 90 top
JP140  M05X2NO_SILK  [2X5_NOSILK]  298.45,141.22 0 top
JP141  M05X2NO_SILK  [2X5_NOSILK]  209.55,141.22 180 top
JP142  [1X02]  255.27,112.01 270 top
JP143  [1X02]  252.73,112.01 270 top
JP144  [1X02]  223.52,115.82 90 top
MOD1  XBEE-1B3  [XBEE-SMD]  55.88,22.1 0 top
MOD2  XBEE-1B3  [XBEE-SMD]  154.94,22.1 0 top
MOD3  XBEE-1B3  [XBEE-SMD]  254,22.1 0 top
MOD4  XBEE-1B3  [XBEE-SMD]  55.88,72.14 0 top
MOD5  XBEE-1B3  [XBEE-SMD]  154.94,72.14 0 top
MOD6  XBEE-1B3  [XBEE-SMD]  254,72.14 0 top
MOD7  XBEE-1B3  [XBEE-SMD]  55.88,122.17 0 top
MOD8  XBEE-1B3  [XBEE-SMD]  154.94,122.17 0 top
MOD9  XBEE-1B3  [XBEE-SMD]  254,122.17 0 top
Q1  [MSOP8]  25.4,29.72 90 top
Q2  [MSOP8]  124.46,29.72 90 top
Q3  [MSOP8]  223.52,29.72 90 top
Q4  [MSOP8]  25.4,79.76 90 top
Q5  [MSOP8]  124.46,79.76 90 top
Q6  [MSOP8]  223.52,79.76 90 top
Q7  [MSOP8]  25.4,129.79 90 top
Q8  [MSOP8]  124.46,129.79 90 top
Q9  [MSOP8]  223.52,129.79 90 top
R1  10k  [0603-RES]  62.87,27.05 180 top
R2  1k  [0603-RES]  50.8,53.85 0 top
R3  1k  [0603-RES]  60.96,53.85 180 top
R4  1k  [0603-RES]  60.71,50.67 90 top
R5  1k  [0603-RES]  82.55,22.1 180 top
R6  1k  [0603-RES]  82.55,23.37 180 top
R7  1k  [0603-RES]  71.12,33.91 90 top
R8  1k  [0603-RES]  68.58,52.58 0 top
R9  10k  [0603-RES]  40.64,23.37 270 top
R10  10k  [0603-RES]  39.37,16.76 0 top
R11  10k  [0603-RES]  25.4,32.26 0 top
R12  10k  [0603-RES]  64.64,23.5 90 top
R13  10k  [0603-RES]  63.5,18.29 90 top
R14  10k  [0603-RES]  161.93,27.05 180 top
R15  1k  [0603-RES]  149.86,53.85 0 top
R16  1k  [0603-RES]  160.02,53.85 180 top
R17  1k  [0603-RES]  181.61,22.1 180 top
R18  1k  [0603-RES]  181.61,23.37 180 top
R19  1k  [0603-RES]  170.18,33.91 90 top
R20  1k  [0603-RES]  167.64,52.58 0 top
R21  10k  [0603-RES]  139.7,23.37 270 top
R22  10k  [0603-RES]  138.43,16.76 0 top
R23  1k  [0603-RES]  159.77,50.67 90 top
R24  10k  [0603-RES]  124.46,32.26 0 top
R25  10k  [0603-RES]  163.7,23.5 90 top
R26  10k  [0603-RES]  162.56,18.29 90 top
R27  10k  [0603-RES]  260.99,27.05 180 top
R28  1k  [0603-RES]  248.92,53.85 0 top
R29  1k  [0603-RES]  259.08,53.85 180 top
R30  1k  [0603-RES]  280.67,22.1 180 top
R31  1k  [0603-RES]  280.67,23.37 180 top
R32  1k  [0603-RES]  269.24,33.91 90 top
R33  1k  [0603-RES]  266.7,52.58 0 top
R34  10k  [0603-RES]  238.76,23.37 270 top
R35  10k  [0603-RES]  237.49,16.76 0 top
R36  1k  [0603-RES]  258.83,50.67 90 top
R37  10k  [0603-RES]  223.52,32.26 0 top
R38  10k  [0603-RES]  262.76,23.5 90 top
R39  10k  [0603-RES]  261.62,18.29 90 top
R40  10k  [0603-RES]  62.87,77.09 180 top
R41  1k  [0603-RES]  50.8,103.89 0 top
R42  1k  [0603-RES]  60.96,103.89 180 top
R43  1k  [0603-RES]  82.55,72.14 180 top
R44  1k  [0603-RES]  82.55,73.41 180 top
R45  1k  [0603-RES]  71.12,83.95 90 top
R46  1k  [0603-RES]  68.58,102.62 0 top
R47  10k  [0603-RES]  40.64,73.41 270 top
R48  10k  [0603-RES]  39.37,66.8 0 top
R49  1k  [0603-RES]  60.71,100.71 90 top
R50  10k  [0603-RES]  25.4,82.3 0 top
R51  10k  [0603-RES]  64.64,73.53 90 top
R52  10k  [0603-RES]  63.5,68.33 90 top
R53  10k  [0603-RES]  161.93,77.09 180 top
R54  1k  [0603-RES]  149.86,103.89 0 top
R55  1k  [0603-RES]  160.02,103.89 180 top
R56  1k  [0603-RES]  181.61,72.14 180 top
R57  1k  [0603-RES]  181.61,73.41 180 top
R58  1k  [0603-RES]  170.18,83.95 90 top
R59  1k  [0603-RES]  167.64,102.62 0 top
R60  10k  [0603-RES]  139.7,73.41 270 top
R61  10k  [0603-RES]  138.43,66.8 0 top
R62  1k  [0603-RES]  159.77,100.71 90 top
R63  10k  [0603-RES]  124.46,82.3 0 top
R64  10k  [0603-RES]  163.7,73.53 90 top
R65  10k  [0603-RES]  162.56,68.33 90 top
R66  10k  [0603-RES]  260.99,77.09 180 top
R67  1k  [0603-RES]  248.92,103.89 0 top
R68  1k  [0603-RES]  259.08,103.89 180 top
R69  1k  [0603-RES]  280.67,72.14 180 top
R70  1k  [0603-RES]  280.67,73.41 180 top
R71  1k  [0603-RES]  269.24,83.95 90 top
R72  1k  [0603-RES]  266.7,102.62 0 top
R73  10k  [0603-RES]  238.76,73.41 270 top
R74  10k  [0603-RES]  237.49,66.8 0 top
R75  1k  [0603-RES]  258.83,100.71 90 top
R76  10k  [0603-RES]  223.52,82.3 0 top
R77  10k  [0603-RES]  262.76,73.53 90 top
R78  10k  [0603-RES]  261.62,68.33 90 top
R79  10k  [0603-RES]  62.87,127.13 180 top
R80  1k  [0603-RES]  50.8,153.92 0 top
R81  1k  [0603-RES]  60.96,153.92 180 top
R82  1k  [0603-RES]  82.55,122.17 180 top
R83  1k  [0603-RES]  82.55,123.44 180 top
R84  1k  [0603-RES]  71.12,133.99 90 top
R85  1k  [0603-RES]  68.58,152.65 0 top
R86  10k  [0603-RES]  40.64,123.44 270 top
R87  10k  [0603-RES]  39.37,116.84 0 top
R88  1k  [0603-RES]  60.71,150.75 90 top
R89  10k  [0603-RES]  25.4,132.33 0 top
R90  10k  [0603-RES]  64.64,123.57 90 top
R91  10k  [0603-RES]  63.5,118.36 90 top
R92  10k  [0603-RES]  161.93,127.13 180 top
R93  1k  [0603-RES]  149.86,153.92 0 top
R94  1k  [0603-RES]  160.02,153.92 180 top
R95  1k  [0603-RES]  181.61,122.17 180 top
R96  1k  [0603-RES]  181.61,123.44 180 top
R97  1k  [0603-RES]  170.18,133.99 90 top
R98  1k  [0603-RES]  167.64,152.65 0 top
R99  10k  [0603-RES]  139.7,123.44 270 top
R100  10k  [0603-RES]  138.43,116.84 0 top
R101  1k  [0603-RES]  159.77,150.75 90 top
R102  10k  [0603-RES]  124.46,132.33 0 top
R103  10k  [0603-RES]  163.7,123.57 90 top
R104  10k  [0603-RES]  162.56,118.36 90 top
R105  10k  [0603-RES]  260.99,127.13 180 top
R106  1k  [0603-RES]  248.92,153.92 0 top
R107  1k  [0603-RES]  259.08,153.92 180 top
R108  1k  [0603-RES]  280.67,122.17 180 top
R109  1k  [0603-RES]  280.67,123.44 180 top
R110  1k  [0603-RES]  269.24,133.99 90 top
R111  1k  [0603-RES]  266.7,152.65 0 top
R112  10k  [0603-RES]  238.76,123.44 270 top
R113  10k  [0603-RES]  237.49,116.84 0 top
R114  1k  [0603-RES]  258.83,150.75 90 top
R115  10k  [0603-RES]  223.52,132.33 0 top
R116  10k  [0603-RES]  262.76,123.57 90 top
R117  10k  [0603-RES]  261.62,118.36 90 top
S1  DPDT  [AYZ0202]  34.29,19.56 180 top
S2  DPDT  [AYZ0202]  34.29,28.45 180 top
S3  DPDT  [AYZ0202]  55.88,51.31 270 top
S4  [TACTILE_SWITCH_SMD]  34.29,38.61 0 top
S5  [TACTILE_SWITCH_SMD]  86.36,28.45 180 top
S6  DPDT  [AYZ0202]  133.35,19.56 180 top
S7  DPDT  [AYZ0202]  133.35,28.45 180 top
S8  DPDT  [AYZ0202]  154.94,51.31 270 top
S9  [TACTILE_SWITCH_SMD]  133.35,38.61 0 top
S10  [TACTILE_SWITCH_SMD]  185.42,28.45 180 top
S11  DPDT  [AYZ0202]  232.41,19.56 180 top
S12  DPDT  [AYZ0202]  232.41,28.45 180 top
S13  DPDT  [AYZ0202]  254,51.31 270 top
S14  [TACTILE_SWITCH_SMD]  232.41,38.61 0 top
S15  [TACTILE_SWITCH_SMD]  284.48,28.45 180 top
S16  DPDT  [AYZ0202]  34.29,69.6 180 top
S17  DPDT  [AYZ0202]  34.29,78.49 180 top
S18  DPDT  [AYZ0202]  55.88,101.35 270 top
S19  [TACTILE_SWITCH_SMD]  34.29,88.65 0 top
S20  [TACTILE_SWITCH_SMD]  86.36,78.49 180 top
S21  DPDT  [AYZ0202]  133.35,69.6 180 top
S22  DPDT  [AYZ0202]  133.35,78.49 180 top
S23  DPDT  [AYZ0202]  154.94,101.35 270 top
S24  [TACTILE_SWITCH_SMD]  133.35,88.65 0 top
S25  [TACTILE_SWITCH_SMD]  185.42,78.49 180 top
S26  DPDT  [AYZ0202]  232.41,69.6 180 top
S27  DPDT  [AYZ0202]  232.41,78.49 180 top
S28  DPDT  [AYZ0202]  254,101.35 270 top
S29  [TACTILE_SWITCH_SMD]  232.41,88.65 0 top
S30  [TACTILE_SWITCH_SMD]  284.48,78.49 180 top
S31  DPDT  [AYZ0202]  34.29,119.63 180 top
S32  DPDT  [AYZ0202]  34.29,128.52 180 top
S33  DPDT  [AYZ0202]  55.88,151.38 270 top
S34  [TACTILE_SWITCH_SMD]  34.29,138.68 0 top
S35  [TACTILE_SWITCH_SMD]  86.36,128.52 180 top
S36  DPDT  [AYZ0202]  133.35,119.63 180 top
S37  DPDT  [AYZ0202]  133.35,128.52 180 top
S38  DPDT  [AYZ0202]  154.94,151.38 270 top
S39  [TACTILE_SWITCH_SMD]  133.35,138.68 0 top
S40  [TACTILE_SWITCH_SMD]  185.42,128.52 180 top
S41  DPDT  [AYZ0202]  232.41,119.63 180 top
S42  DPDT  [AYZ0202]  232.41,128.52 180 top
S43  DPDT  [AYZ0202]  254,151.38 270 top
S44  [TACTILE_SWITCH_SMD]  232.41,138.68 0 top
S45  [TACTILE_SWITCH_SMD]  284.48,128.52 180 top
SFE-LOGO1  LOGO-SFENEW  [SFE-NEW-WEBLOGO]  73.28,7.62 0 top
SFE-LOGO2  LOGO-SFENEW  [SFE-NEW-WEBLOGO]  172.34,7.62 0 top
SFE-LOGO3  LOGO-SFENEW  [SFE-NEW-WEBLOGO]  271.4,7.62 0 top
SFE-LOGO4  LOGO-SFENEW  [SFE-NEW-WEBLOGO]  73.28,57.66 0 top
SFE-LOGO5  LOGO-SFENEW  [SFE-NEW-WEBLOGO]  172.34,57.66 0 top
SFE-LOGO6  LOGO-SFENEW  [SFE-NEW-WEBLOGO]  271.4,57.66 0 top
SFE-LOGO7  LOGO-SFENEW  [SFE-NEW-WEBLOGO]  73.28,107.7 0 top
SFE-LOGO8  LOGO-SFENEW  [SFE-NEW-WEBLOGO]  172.34,107.7 0 top
SFE-LOGO9  LOGO-SFENEW  [SFE-NEW-WEBLOGO]  271.4,107.7 0 top
STANDOFF1  STAND-OFF  [STAND-OFF]  100.33,9.4 0 top
STANDOFF2  STAND-OFF  [STAND-OFF]  11.88,53.85 0 top
STANDOFF3  STAND-OFF  [STAND-OFF]  11.43,9.4 0 top
STANDOFF4  STAND-OFF  [STAND-OFF]  100.33,53.85 0 top
STANDOFF5  STAND-OFF  [STAND-OFF]  199.39,9.4 0 top
STANDOFF6  STAND-OFF  [STAND-OFF]  110.94,53.85 0 top
STANDOFF7  STAND-OFF  [STAND-OFF]  110.49,9.4 0 top
STANDOFF8  STAND-OFF  [STAND-OFF]  199.39,53.85 0 top
STANDOFF9  STAND-OFF  [STAND-OFF]  298.45,9.4 0 top
STANDOFF10  STAND-OFF  [STAND-OFF]  210,53.85 0 top
STANDOFF11  STAND-OFF  [STAND-OFF]  209.55,9.4 0 top
STANDOFF12  STAND-OFF  [STAND-OFF]  298.45,53.85 0 top
STANDOFF13  STAND-OFF  [STAND-OFF]  100.33,59.44 0 top
STANDOFF14  STAND-OFF  [STAND-OFF]  11.88,103.89 0 top
STANDOFF15  STAND-OFF  [STAND-OFF]  11.43,59.44 0 top
STANDOFF16  STAND-OFF  [STAND-OFF]  100.33,103.89 0 top
STANDOFF17  STAND-OFF  [STAND-OFF]  199.39,59.44 0 top
STANDOFF18  STAND-OFF  [STAND-OFF]  110.94,103.89 0 top
STANDOFF19  STAND-OFF  [STAND-OFF]  110.49,59.44 0 top
STANDOFF20  STAND-OFF  [STAND-OFF]  199.39,103.89 0 top
STANDOFF21  STAND-OFF  [STAND-OFF]  298.45,59.44 0 top
STANDOFF22  STAND-OFF  [STAND-OFF]  210,103.89 0 top
STANDOFF23  STAND-OFF  [STAND-OFF]  209.55,59.44 0 top
STANDOFF24  STAND-OFF  [STAND-OFF]  298.45,103.89 0 top
STANDOFF25  STAND-OFF  [STAND-OFF]  100.33,109.47 0 top
STANDOFF26  STAND-OFF  [STAND-OFF]  11.88,153.92 0 top
STANDOFF27  STAND-OFF  [STAND-OFF]  11.43,109.47 0 top
STANDOFF28  STAND-OFF  [STAND-OFF]  100.33,153.92 0 top
STANDOFF29  STAND-OFF  [STAND-OFF]  199.39,109.47 0 top
STANDOFF30  STAND-OFF  [STAND-OFF]  110.94,153.92 0 top
STANDOFF31  STAND-OFF  [STAND-OFF]  110.49,109.47 0 top
STANDOFF32  STAND-OFF  [STAND-OFF]  199.39,153.92 0 top
STANDOFF33  STAND-OFF  [STAND-OFF]  298.45,109.47 0 top
STANDOFF34  STAND-OFF  [STAND-OFF]  210,153.92 0 top
STANDOFF35  STAND-OFF  [STAND-OFF]  209.55,109.47 0 top
STANDOFF36  STAND-OFF  [STAND-OFF]  298.45,153.92 0 top
U1  ATMEGA328P  [TQFP32-08]  55.88,36.07 0 top
U2  TB6612FNG  [SSOP24]  55.88,22.1 0 top
U3  MIC5219 5V  [SOT23-5]  24.13,11.94 90 top
U4  MIC5219 3.3V  [SOT23-5]  45.72,50.04 90 top
U5  FT232RLSSOP  [SSOP28DB]  76.2,22.1 270 top
U6  7408SE  [SOT353]  63.5,20.83 90 top
U7  ATMEGA328P  [TQFP32-08]  154.94,36.07 0 top
U8  FT232RLSSOP  [SSOP28DB]  175.26,22.1 270 top
U9  TB6612FNG  [SSOP24]  154.94,22.1 0 top
U10  MIC5219 5V  [SOT23-5]  123.19,11.94 90 top
U11  MIC5219 3.3V  [SOT23-5]  144.78,50.04 90 top
U12  7408SE  [SOT353]  162.56,20.83 90 top
U13  ATMEGA328P  [TQFP32-08]  254,36.07 0 top
U14  FT232RLSSOP  [SSOP28DB]  274.32,22.1 270 top
U15  TB6612FNG  [SSOP24]  254,22.1 0 top
U16  MIC5219 5V  [SOT23-5]  222.25,11.94 90 top
U17  MIC5219 3.3V  [SOT23-5]  243.84,50.04 90 top
U18  7408SE  [SOT353]  261.62,20.83 90 top
U19  ATMEGA328P  [TQFP32-08]  55.88,86.11 0 top
U20  FT232RLSSOP  [SSOP28DB]  76.2,72.14 270 top
U21  TB6612FNG  [SSOP24]  55.88,72.14 0 top
U22  MIC5219 5V  [SOT23-5]  24.13,61.98 90 top
U23  MIC5219 3.3V  [SOT23-5]  45.72,100.08 90 top
U24  7408SE  [SOT353]  63.5,70.87 90 top
U25  ATMEGA328P  [TQFP32-08]  154.94,86.11 0 top
U26  FT232RLSSOP  [SSOP28DB]  175.26,72.14 270 top
U27  TB6612FNG  [SSOP24]  154.94,72.14 0 top
U28  MIC5219 5V  [SOT23-5]  123.19,61.98 90 top
U29  MIC5219 3.3V  [SOT23-5]  144.78,100.08 90 top
U30  7408SE  [SOT353]  162.56,70.87 90 top
U31  ATMEGA328P  [TQFP32-08]  254,86.11 0 top
U32  FT232RLSSOP  [SSOP28DB]  274.32,72.14 270 top
U33  TB6612FNG  [SSOP24]  254,72.14 0 top
U34  MIC5219 5V  [SOT23-5]  222.25,61.98 90 top
U35  MIC5219 3.3V  [SOT23-5]  243.84,100.08 90 top
U36  7408SE  [SOT353]  261.62,70.87 90 top
U37  ATMEGA328P  [TQFP32-08]  55.88,136.14 0 top
U38  FT232RLSSOP  [SSOP28DB]  76.2,122.17 270 top
U39  TB6612FNG  [SSOP24]  55.88,122.17 0 top
U40  MIC5219 5V  [SOT23-5]  24.13,112.01 90 top
U41  MIC5219 3.3V  [SOT23-5]  45.72,150.11 90 top
U42  7408SE  [SOT353]  63.5,120.9 90 top
U43  ATMEGA328P  [TQFP32-08]  154.94,136.14 0 top
U44  FT232RLSSOP  [SSOP28DB]  175.26,122.17 270 top
U45  TB6612FNG  [SSOP24]  154.94,122.17 0 top
U46  MIC5219 5V  [SOT23-5]  123.19,112.01 90 top
U47  MIC5219 3.3V  [SOT23-5]  144.78,150.11 90 top
U48  7408SE  [SOT353]  162.56,120.9 90 top
U49  ATMEGA328P  [TQFP32-08]  254,136.14 0 top
U50  FT232RLSSOP  [SSOP28DB]  274.32,122.17 270 top
U51  TB6612FNG  [SSOP24]  254,122.17 0 top
U52  MIC5219 5V  [SOT23-5]  222.25,112.01 90 top
U53  MIC5219 3.3V  [SOT23-5]  243.84,150.11 90 top
U54  7408SE  [SOT353]  261.62,120.9 90 top
U$1  OSHW-LOGOS  [OSHW-LOGO-S]  186.69,14.48 0 top
U$2  REDBOT_LOGO  [REDBOT_LOGO]  173.74,18.29 0 bottom
U$3  OSHW-LOGOS  [OSHW-LOGO-S]  285.75,14.48 0 top
U$4  REDBOT_LOGO  [REDBOT_LOGO]  272.8,18.29 0 bottom
U$5  OSHW-LOGOS  [OSHW-LOGO-S]  87.63,64.52 0 top
U$6  REDBOT_LOGO  [REDBOT_LOGO]  74.68,68.33 0 bottom
U$7  OSHW-LOGOS  [OSHW-LOGO-S]  186.69,64.52 0 top
U$8  REDBOT_LOGO  [REDBOT_LOGO]  173.74,68.33 0 bottom
U$9  OSHW-LOGOS  [OSHW-LOGO-S]  285.75,64.52 0 top
U$10  REDBOT_LOGO  [REDBOT_LOGO]  272.8,68.33 0 bottom
U$11  OSHW-LOGOS  [OSHW-LOGO-S]  87.63,114.55 0 top
U$12  REDBOT_LOGO  [REDBOT_LOGO]  74.68,118.36 0 bottom
U$13  OSHW-LOGOS  [OSHW-LOGO-S]  186.69,114.55 0 top
U$14  REDBOT_LOGO  [REDBOT_LOGO]  173.74,118.36 0 bottom
U$15  OSHW-LOGOS  [OSHW-LOGO-S]  285.75,114.55 0 top
U$16  REDBOT_LOGO  [REDBOT_LOGO]  272.8,118.36 0 bottom
U$17  OSHW-LOGOS  [OSHW-LOGO-S]  87.63,14.48 0 top
U$23  REDBOT_LOGO  [REDBOT_LOGO]  74.68,18.29 0 bottom
Y1  16MHz  [RESONATOR-SMD]  49.02,33.53 270 top
Y2  16MHz  [RESONATOR-SMD]  148.08,33.53 270 top
Y3  16MHz  [RESONATOR-SMD]  247.14,33.53 270 top
Y4  16MHz  [RESONATOR-SMD]  49.02,83.57 270 top
Y5  16MHz  [RESONATOR-SMD]  148.08,83.57 270 top
Y6  16MHz  [RESONATOR-SMD]  247.14,83.57 270 top
Y7  16MHz  [RESONATOR-SMD]  49.02,133.6 270 top
Y8  16MHz  [RESONATOR-SMD]  148.08,133.6 270 top
Y9  16MHz  [RESONATOR-SMD]  247.14,133.6 270 top

## Library data of the parts
C1-C7 C10-C14 C17-C22 C25-C30 C33-C38 C41-C46 C49-C54 C57-C62 C65-C70 = SparkFun-Capacitors; PROD_ID: CAP-00810
C8 C9 C15 C16 C23 C24 C31 C32 C39 C40 C47 C48 C55 C56 C63 C64 C71 C72 = SparkFun-Capacitors; PROD_ID: CAP-00811
D1 D2 D7 D8 D13 D14 D19 D20 D25 D26 D31 D32 D37 D38 D43 D44 D49 D50 = SparkFun-DiscreteSemi; PROD_ID: DIO-09886
D3-D6 D9-D12 D15-D18 D21-D24 D27-D30 D33-D36 D39-D42 D45-D48 D51-D54 = SparkFun-LED; PROD_ID: DIO-00821
E$1 = SparkFun-Retired
E$7 E$8 FID1-FID18 SFE-LOGO1-SFE-LOGO9 U$1-U$17 U$23 = SparkFun-Aesthetics
F1-F9 = SparkFun-PowerIC; PROD_ID: RES-11150
JP1 JP2 JP19 JP20 JP35 JP36 JP51 JP52 JP67 JP68 JP83 JP84 JP99 JP100 JP115 JP116 JP131 JP132 = SparkFun-Connectors; PROD_ID: CONN-10926
JP3 JP17 JP33 JP49 JP65 JP81 JP97 JP113 JP129 = SparkFun-Connectors; PROD_ID: CONN-08106
JP4-JP7 JP14-JP16 JP18 JP27-JP32 JP34 JP43-JP48 JP50 JP59-JP64 JP66 JP75-JP80 JP82 JP91-JP96 JP98 JP107-JP112 JP114 JP123-JP128 JP130 JP139-JP144 = SparkFun-Connectors
JP8-JP13 JP21-JP26 JP37-JP42 JP53-JP58 JP69-JP74 JP85-JP90 JP101-JP106 JP117-JP122 JP133-JP138 = SparkFun-Connectors; PROD_ID: CONN-11415
MOD1-MOD9 = SparkFun-RF; PROD_ID: CONN-09042
Q1-Q9 = SparkFun-DiscreteSemi; PROD_ID: TRANS-07913
R1 R9-R14 R21 R22 R24-R27 R34 R35 R37-R40 R47 R48 R50-R53 R60 R61 R63-R66 R73 R74 R76-R79 R86 R87 R89-R92 R99 R100 R102-R105 R112 R113 R115-R117 = SparkFun-Resistors; PROD_ID: RES-00824
R2-R8 R15-R20 R23 R28-R33 R36 R41-R46 R49 R54-R59 R62 R67-R72 R75 R80-R85 R88 R93-R98 R101 R106-R111 R114 = SparkFun-Resistors; PROD_ID: RES-07856
S1-S3 S6-S8 S11-S13 S16-S18 S21-S23 S26-S28 S31-S33 S36-S38 S41-S43 = SparkFun-Electromechanical; PROD_ID: SWCH-08179
S4 S5 S9 S10 S14 S15 S19 S20 S24 S25 S29 S30 S34 S35 S39 S40 S44 S45 = SparkFun-Electromechanical; PROD_ID: SWCH-08247
STANDOFF1-STANDOFF36 = SparkFun-Electromechanical
U1 U7 U13 U19 U25 U31 U37 U43 U49 = SparkFun-DigitalIC; PROD_ID: IC-09069
U2 U9 U15 U21 U27 U33 U39 U45 U51 = SparkFun-PowerIC; PROD_ID: IC-09363
U3 U10 U16 U22 U28 U34 U40 U46 U52 = SparkFun-PowerIC; PROD_ID: VREG-10107
U4 U11 U17 U23 U29 U35 U41 U47 U53 = SparkFun-PowerIC; PROD_ID: VREG-09872
U5 U8 U14 U20 U26 U32 U38 U44 U50 = SparkFun-DigitalIC; PROD_ID: IC-00870
U6 U12 U18 U24 U30 U36 U42 U48 U54 = SparkFun-DigitalIC; PROD_ID: IC-10841
Y1-Y9 = SparkFun-FreqCtrl; PROD_ID: XTAL-08900